# Allegro board PULSE MODULATION.brd
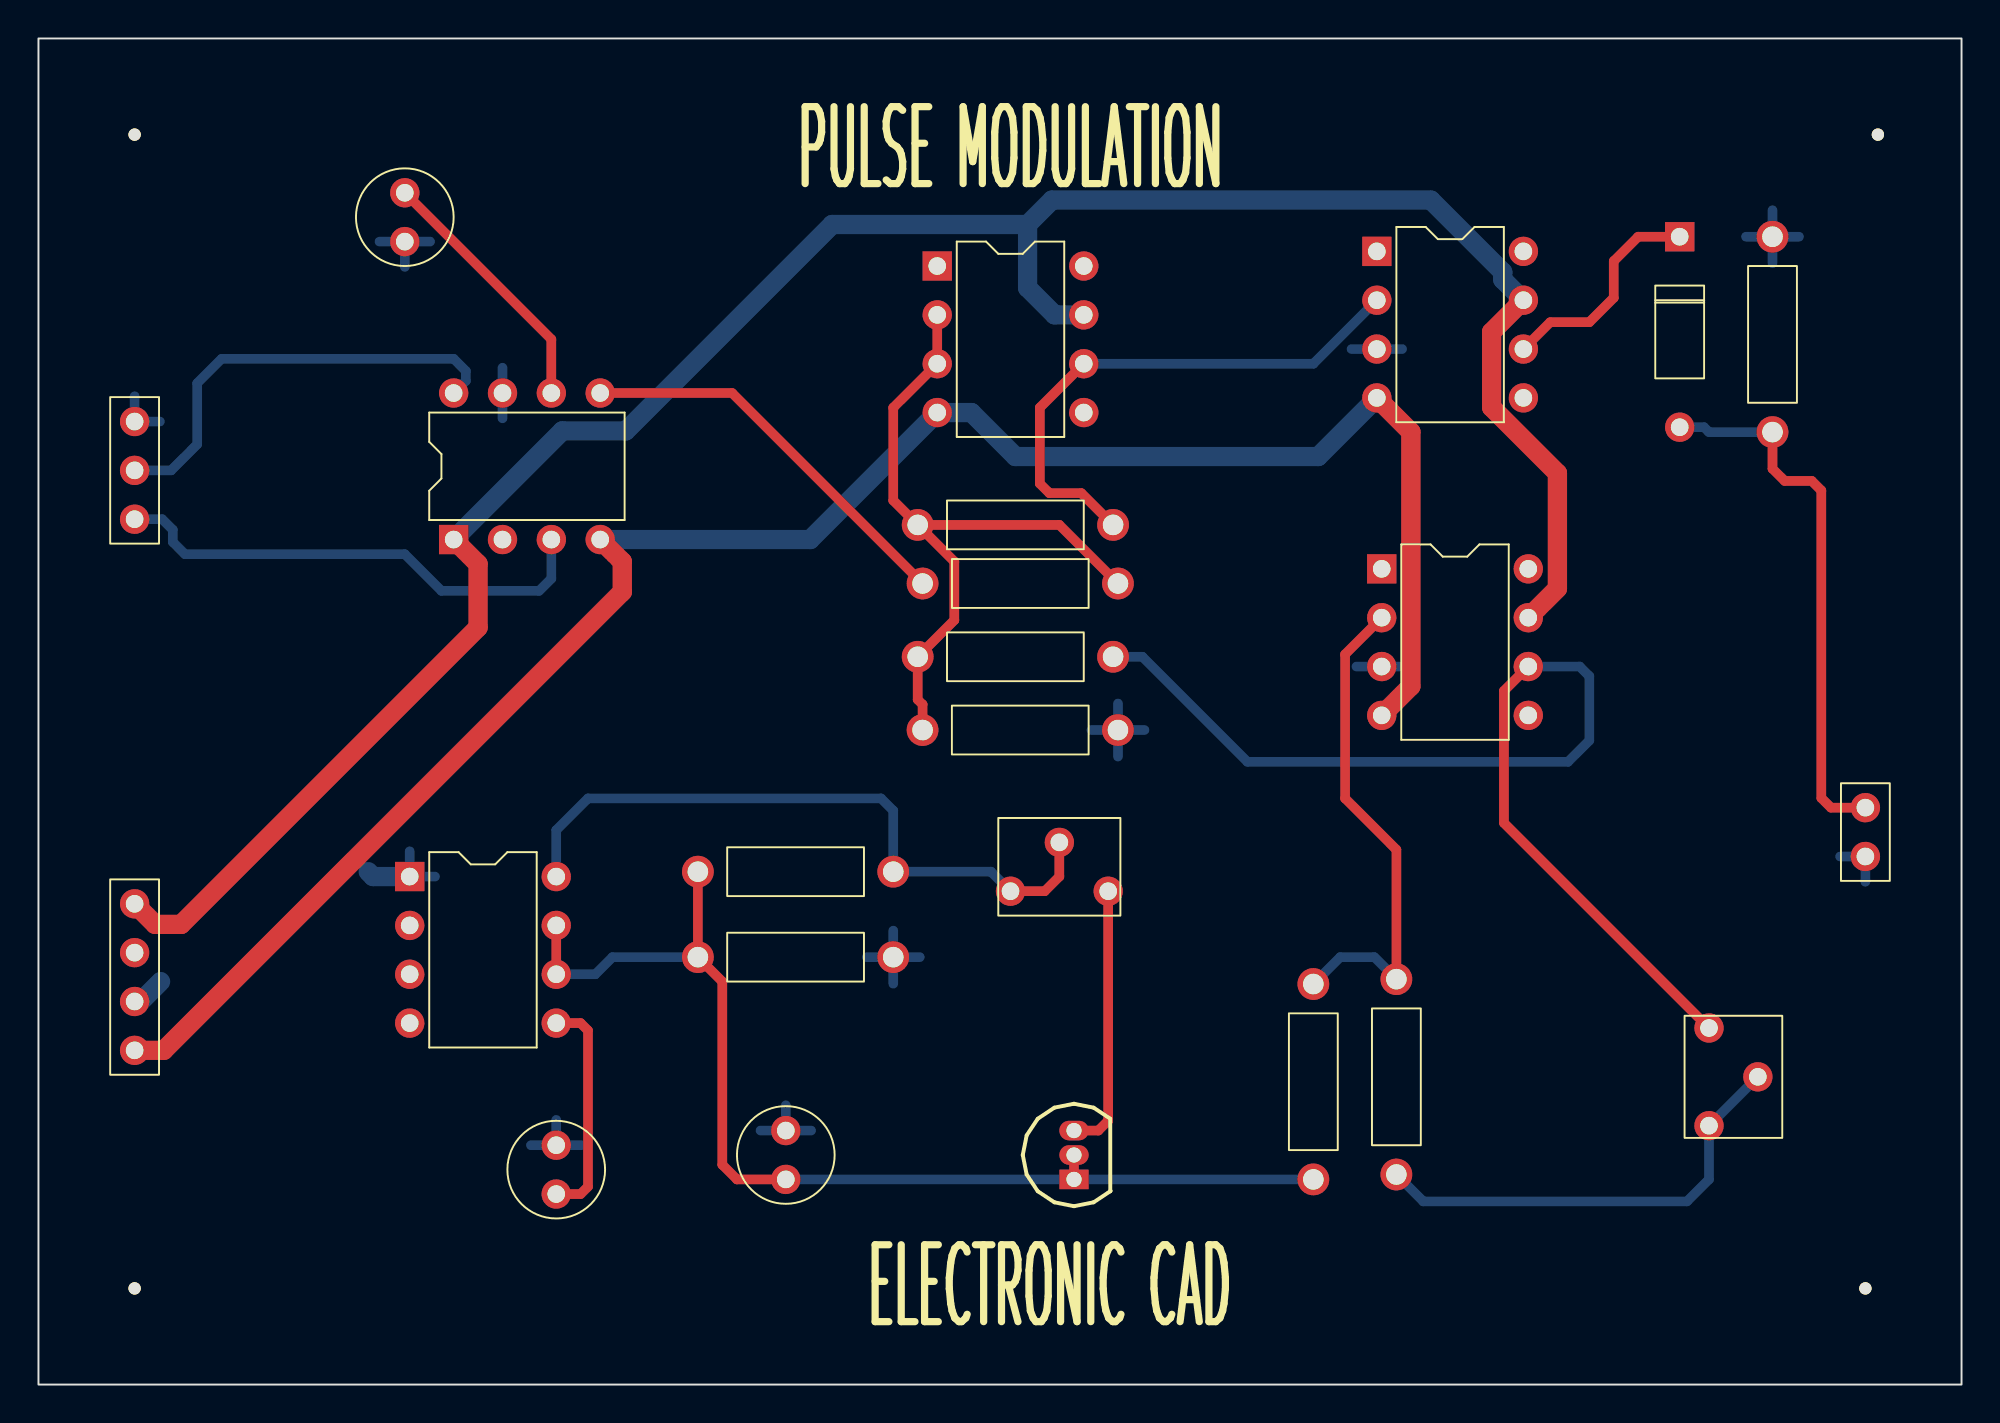
[diagram p0: board, top side]
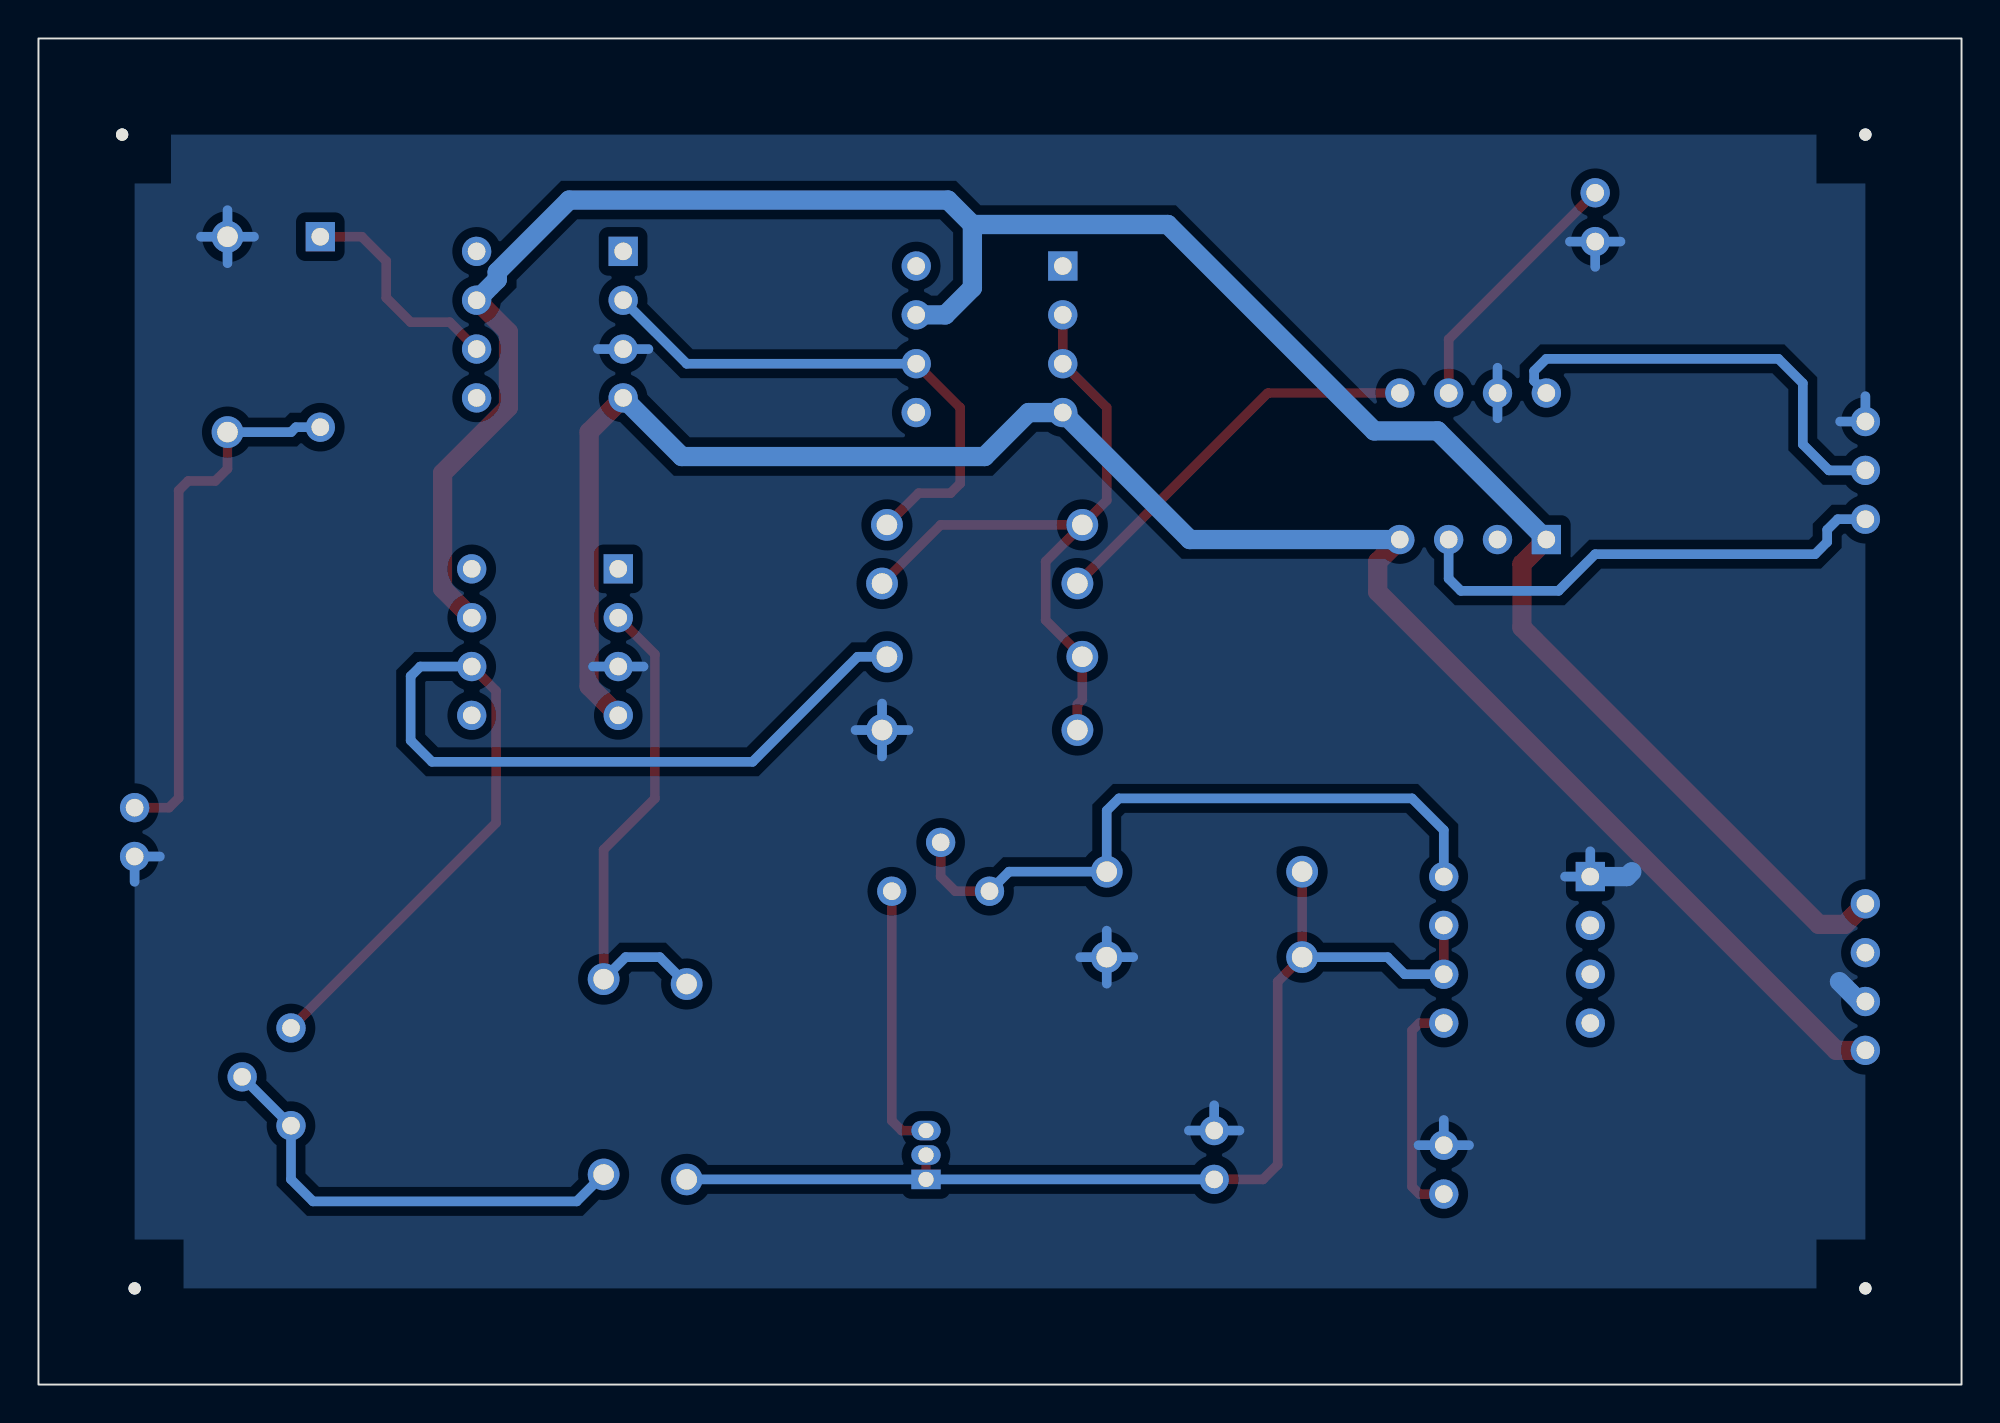
[diagram p1: board, bottom side, seen from below]

Outline 100 x 70 mm; copper layers: TOP, BOTTOM. Coordinates in mm from the lower left corner of the outline.
Outline path: rectangle 0,0 100,70

## Design rules (mm)
constraint set DEFAULT: min track width 0.5
nets with their own width: min track width 1; nets +5V +15V -15V GND

## Placement (name value [footprint] x y rotation side)
C1  0.01uF  [CAP196]  38.86 10.67 0 top
C2  0.01uF  [CAP196]  26.92 9.91 0 top
C3  0.01uF  [CAP196]  19.05 61.98 180 top
D1  D1S1588  [DO41]  85.34 59.69 180 top
J1  CON4  [JUMPER4]  5 25 270 top
J2  CON3  [JUMPER3]  5 45 90 top
J3  CON2  [JUMPER2]  95 30 270 top
NOREF  -  [unnamed]  95.65 65 0 top
NOREF#2  -  [unnamed]  5 5 0 top
NOREF#3  -  [unnamed]  95 5 0 top
NOREF#4  -  [#2]  100 0 90 top
NOREF#5  -  [unnamed]  5 65 0 top
NOREF#6  -  [#2]  0 70 0 top
Q1  PNP BCE  [TO92]  53.85 10.67 90 top
R1  560  [RES400]  70.61 21.08 180 top
R2  39k  [RES400]  44.45 26.67 90 top
R3  6.2k  [RES400]  66.29 20.83 180 top
R4  100k  [RES400]  34.29 22.23 270 top
R5  10k  [RES400]  55.88 37.85 90 top
R6  10k  [RES400]  45.72 44.7 270 top
R7  10k  [RES400]  45.97 41.66 270 top
R8  10k  [RES400]  56.13 34.04 90 top
R9  10k  [RES400]  90.17 59.69 180 top
U1  NE555  [DIP8_3]  19.3 26.42 0 top
U2  LF356  [DIP8_3]  69.85 42.42 0 top
U3  LF398  [DIP8_3]  21.59 43.94 90 top
U4  LF356  [DIP8_3]  46.74 58.17 0 top
U5  LF356  [DIP8_3]  69.6 58.93 0 top
VR1  5k  [RESADJ]  55.63 25.65 270 top
VR2  20k  [RESADJ]  86.87 13.46 180 top

## Library data of the parts
C1-C3 = CAP NP: Tolerance: ***; User Part Number: ***
D1 = D1S1588
J1 = CON4: User Part Number: ***
J2 = CON3: User Part Number: ***
J3 = CON2: User Part Number: ***
Q1 = PNP BCE
R1-R9 = R: Tolerance: ***; User Part Number: ***
U1 = NE555_1: Tolerance: ***; User Part Number: ***
U2 U4 U5 = LF356_2: Tolerance: ***; User Part Number: ***
U3 = LF398_1: Tolerance: ***; User Part Number: ***
VR1 VR2 = POT: Tolerance: ***; User Part Number: ***

## Footprints (pads in the part's own frame, mm; a bottom-side part is the same pattern mirrored in y, then rotated)
CAP196
  round 1.524 hole 0.914: 1(0,0) 2(0,2.54)
DIP8_3
  rect 1.524x1.524 hole 0.914: 1(0,0)
  round 1.524 hole 0.914: 2(0,-2.54) 3(0,-5.08) 4(0,-7.62) 5(7.62,-7.62) 6(7.62,-5.08) 7(7.62,-2.54) 8(7.62,0)
DO41
  rect 1.524x1.524 hole 0.914: 1(0,0)
  round 1.524 hole 0.914: 2(0,9.906)
JUMPER2
  round 1.524 hole 0.914: 1(0,0) 2(2.54,0)
JUMPER3
  round 1.524 hole 0.914: 1(0,0) 2(2.54,0) 3(5.08,0)
JUMPER4
  round 1.524 hole 0.914: 1(0,0) 2(2.54,0) 3(5.08,0) 4(7.62,0)
RES400
  round 1.651 hole 1.067: 1(0,0) 2(0,10.16)
RESADJ
  round 1.524 hole 0.914: 1(0,0) 2(-2.54,-2.54) 3(0,-5.08)
TO92
  rect 1.016x1.524 hole 0.787: 1(0,0)
  oval 1.016x1.524 hole 0.787: 2(1.27,0) 3(2.54,0)
unnamed
  round 0.635 hole 3.175 unplated: (0,0)

## Nets
+5V: J1.2
+15V: J1.1 U2.7 U3.1 U4.7 U5.7
-15V: J1.4 U2.4(V-) U3.4(V-) U4.4(V-) U5.4(V-)
GND: C1.2 C2.2 C3.2 J1.3 J2.3 J3.2 R4.2 R8.1 R9.1 U1.1 U2.3 U3.7 U5.3
VCC: R2.1 U1.8(VCC) VR1.2(WIPER) VR1.3
CLOCK: U1.2
SIG_1: R5.1 U2.6 VR2.3
N00608: C2.1 U1.5
N00615: C1.1 Q1.1 Q1.2 R2.2 R3.2 R4.1 U1.6 U1.7
N00943: Q1.3(E) VR1.1
N01073: R1.1 R3.1 U2.2
N01241: R1.2 VR2.1 VR2.2(WIPER)
N01945: J2.1 U3.3
N01949: J2.2 U3.8
N02007: R7.1 U3.5
N02070: C3.1 U3.6
N02349: R5.2 R6.1 R7.2 R8.2 U4.2 U4.3
N02669: R6.2 U4.6 U5.2
N02839: D1.1 U5.6
N02869: D1.2 J3.1 R9.2

Pads without a net: U1 3 4; U2 1 5 8; U3 2; U4 1 5 8; U5 1 5 8

## Routing (per net, layer and track width the routed paths; a pad name or vN(x,y) marks a point on that pad's centre or on a via; arc(x,y) is an arc through that point)
+15V: length 121.2
  TOP w1: U3.1 22.86,42.67 22.86,39.37 7.42,23.93 6.07,23.93 J1.1 ; U5.7 75.56,54.74 75.56,50.81 78.99,47.39 78.99,41.39 U2.7
  BOTTOM w1: U3.1 27.24,49.59 30.54,49.59 41.27,60.33 51.44,60.33 ; 51.44,60.33 52.7,61.59 72.4,61.59 76.14,57.85 76.14,57.46 U5.7 ; 51.44,60.33 51.44,57.03 52.84,55.63 U4.7
-15V: length 101.6
  TOP w1: J1.4 6.52,17.38 30.36,41.22 30.36,42.79 U3.4 ; U2.4 71.37,36.31 71.37,49.54 U5.4
  BOTTOM w1: U3.4 40.13,43.94 U4.4 48.51,50.55 50.8,48.26 66.55,48.26 U5.4
GND: length 48.2
  BOTTOM w0.5: 68.28,53.85 U5.3 70.91,53.85 ; 95,26.14 J3.2 93.69,27.46 ; 19.05,58.12 C3.2 ; C3.2 20.36,59.44 ; C3.2 17.73,59.44 ; R9.1 91.55,59.69 ; R9.1 90.17,61.07 ; R9.1 90.17,58.31 ; R9.1 88.79,59.69 ; 25.61,12.45 C2.2 ; C2.2 28.24,12.45 ; C2.2 26.92,13.76 ; 24.13,52.88 U3.7 24.13,50.25 ; R8.1 56.13,35.41 ; R8.1 54.76,34.04 ; R8.1 56.13,32.66 ; R8.1 57.51,34.04 ; 71.17,37.34 U2.3 68.53,37.34 ; 19.3,27.73 U1.1 20.62,26.42 ; C1.2 38.86,14.52 ; C1.2 37.55,13.21 ; C1.2 40.18,13.21 ; 43.07,22.23 R4.2 ; R4.2 45.83,22.23 ; R4.2 44.45,23.6 ; R4.2 44.45,20.85 ; 6.32,50.08 J2.3 5,51.4
  BOTTOM w1: U1.1 17.4,26.42 17.14,26.67 ; J1.3 5.32,19.92 6.35,20.95
VCC: length 35.2
  TOP w0.5: VR1.3 52.32,25.65 53.09,26.42 VR1.2
  BOTTOM w0.5: VR1.3 49.53,26.67 R2.1 44.45,29.84 43.81,30.48 28.57,30.48 26.92,28.83 U1.8
SIG_1: length 58
  TOP w0.5: U2.6 76.2,36.07 76.2,29.21 VR2.3
  BOTTOM w0.5: U2.6 80.14,37.34 80.64,36.84 80.64,33.49 79.54,32.38 62.87,32.38 57.4,37.85 R5.1
N00608: length 11.7
  TOP w0.5: U1.5 28.19,18.8 28.57,18.41 28.57,10.29 28.19,9.91 C2.1
N00615: length 58.4
  TOP w0.5: C1.1 36.32,10.67 35.56,11.43 35.56,20.95 R4.1 R2.2 ; Q1.1 Q1.2 ; U1.7 U1.6
  BOTTOM w0.5: C1.1 Q1.1 R3.2 ; R4.1 29.84,22.23 28.96,21.34 U1.6
N00943: length 13.9
  TOP w0.5: Q1.3 55.11,13.21 55.63,13.72 VR1.1
N01073: length 26.1
  TOP w0.5: R1.1 70.61,27.81 67.94,30.48 67.94,37.97 U2.2
  BOTTOM w0.5: R3.1 67.69,22.23 69.47,22.23 R1.1
N01241: length 23.7
  BOTTOM w0.5: VR2.2 VR2.1 86.87,10.67 85.72,9.53 72.01,9.53 R1.2
N01945: length 25.9
  BOTTOM w0.5: U3.3 26.67,41.91 26.04,41.27 20.95,41.27 19.05,43.18 7.62,43.18 6.99,43.81 6.99,44.45 6.43,45 J2.1
N01949: length 23.2
  BOTTOM w0.5: U3.8 22.23,52.2 22.23,52.7 21.59,53.34 9.53,53.34 8.26,52.07 8.26,48.9 6.9,47.54 J2.2
N02007: length 20.9
  TOP w0.5: U3.5 36.07,51.56 R7.1
N02070: length 13.6
  TOP w0.5: U3.6 26.67,54.36 C3.1
N02349: length 36.4
  TOP w0.5: R6.1 44.45,45.97 44.45,50.8 U4.3 U4.2 ; R6.1 53.09,44.7 R7.2 ; R6.1 47.62,42.8 47.62,39.75 R5.2 45.72,35.62 45.97,35.37 R8.2
N02669: length 28.5
  TOP w0.5: R6.2 54.23,46.35 52.57,46.35 52.07,46.85 52.07,50.8 U4.6
  BOTTOM w0.5: U4.6 66.29,53.09 U5.2
N02839: length 11.7
  TOP w0.5: D1.1 83.19,59.69 81.92,58.42 81.92,56.52 80.64,55.24 78.61,55.24 U5.6
N02869: length 28.3
  TOP w0.5: R9.2 90.17,47.62 90.81,46.99 92.21,46.99 92.71,46.49 92.71,30.5 93.21,30 J3.1
  BOTTOM w0.5: R9.2 86.86,49.53 86.61,49.78 D1.2

## Copper pours and planes (outline as drawn; the poured copper is in the pictures)
GND on BOTTOM: 95,5 95,65 5,65 5,5 ; 2 cut-outs

## Text on the board
Ref Des/Silkscreen Top: PULSE MODULATION | ELECTRONIC CAD
DIMENSION: FIGURE | FINISHED_SIZE | 0.787 | 0.914 | 1.067 | 3.175 | DRILL CHART: TOP to BOTTOM | ALL UNITS ARE IN MILLIMETERS | PLATED | NON-PLATED | QTY | 3 | 63 | 18 | 4
